# EAGLE board LEDDriver (EAGLE 7.4.0)
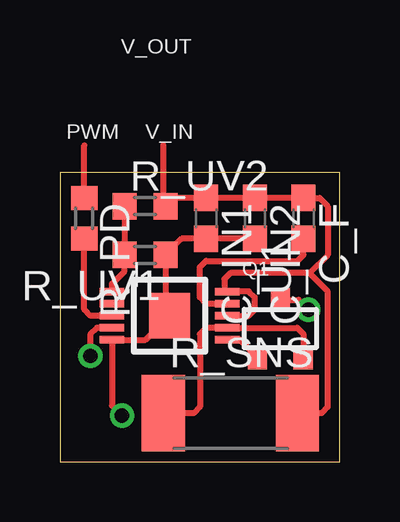
[diagram p0: board, top side]
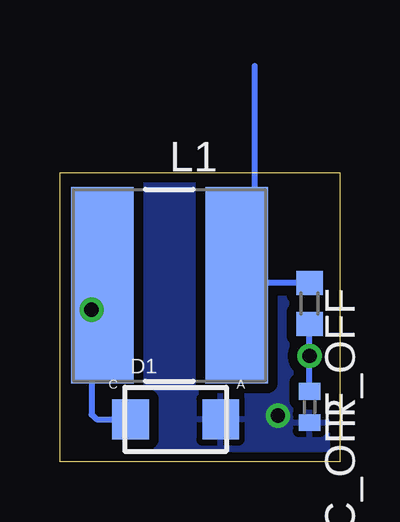
[diagram p1: board, bottom side, seen from below]

Size 11.68 x 12.06 mm. Coordinates in mm from the lower left corner, seen from the top.
Outline: 0,0 11.68,0 11.68,12.06 0,12.06 0,0
Copper layers (1*16): Top 0.035559375mm / dielectric 1.501140625mm / Bottom 0.035559375mm
Design rules "typical_4pcb": minimum track width 10mil, minimum drill 15mil, track to track 6mil, track to pad 6mil, pad to pad 6mil, via to via 6mil, smd to smd 6mil, copper to edge 15mil, drill to drill 8mil, minimum pad ring 10mil, minimum via ring 8mil, stop-mask expansion 4mil, vias tented up to drill 0mil, thermal gap 10mil

## Footprints (pad centres in the part's own frame; a part is rotated, then mirrored left to right if it is on the bottom)
C0603 = smd 1.1 x 1: 1 -0.85,0; 2 0.85,0
C0402 = smd 0.7 x 0.9: 1 -0.65,0; 2 0.65,0
SL12-E3/61T = smd 1.524 x 1.676: 1 -1.88,0; 2 1.88,0
SRN8040 = smd 2.6 x 8.2: 1 -2.8,0; 2 2.8,0
DMP2012SN-7 = smd 0.8 x 1: 1 0,1.2; 2 -0.95,-1.2; 3 0.95,-1.2
R0603 = smd 1 x 1.1: 1 -0.85,0; 2 0.85,0
R2512 = smd 1.8 x 3.2: 1 -2.8,0; 2 2.8,0
VSSOP-10 = smd 0.305 x 1.016: 1 -1.001,-2.4; 2 -0.5,-2.4; 3 0,-2.4; 4 0.5,-2.4; 5 1.001,-2.4; 6 1.001,2.4; 7 0.5,2.4; 8 0,2.4; 9 -0.5,2.4; 10 -1.001,2.4 | smd 1.905 x 1.727: DAP 0,0

## Placement (x,y rotation side)
C_F  1.0E-6  [C0603]  10.16,10.16 270 top
C_IN1  2.2E-6  [C0603]  6.1,10.16 270 top
C_IN2  2.2E-6  [C0603]  8.13,10.16 270 top
C_OFF  470E-12  [C0402]  1.27,2.29 270 bottom
D1  SL12-E3/61T  [SL12-E3/61T]  6.86,1.78 0 bottom
FRAME1  FRAME-LETTER  [CREATIVE_COMMONS]  -8.38,-12.95 0 top  (outside the outline)
L1  15E-6  [SRN8040]  7.11,7.37 0 bottom
Q1  DMP2012SN-7  [DMP2012SN-7]  9.19,5.56 0 top
R_OFF  7870  [R0603]  1.27,6.6 270 bottom
R_PD  10000  [R0603]  1.02,10.16 270 top
R_SNS  0.365  [R2512]  7.11,2.03 0 top
R_UV1  22600  [R0603]  3.56,8.64 180 top
R_UV2  13700  [R0603]  3.56,10.67 0 top
U1  LM3409HV'LM3409HV'  [VSSOP-10]  4.57,6.1 270 top

## Library data of the parts
C_F C_IN1 C_IN2 C_OFF = eagle-ltspice; SPICEMODEL: NONE; SPICEPREFIX: C
D1 L1 Q1 R_OFF R_PD R_SNS R_UV1 R_UV2 = DiscreteComponents
FRAME1 = SparkFun-Aesthetics
U1 = 2015_LED_Driver

## Nets
GND: C_IN1.2 C_IN2.2 C_OFF.2 D1.2 R_UV1.1 U1.5 U1.DAP
L1: D1.1 L1.1 Q1.1
N$1: C_F.2 U1.9
N$2: R_UV1.2 R_UV2.1 U1.1
N$3: Q1.2 U1.6
N$5: R_PD.2 U1.3
N$6: C_OFF.1 R_OFF.2 U1.4
N$8: Q1.3 R_SNS.1 U1.7
PWM: R_PD.1
V_IN: C_F.1 C_IN1.1 C_IN2.1 R_SNS.2 R_UV2.2 U1.8 U1.10
V_OUT: L1.2 R_OFF.1

## Tracks (layer width: path | path; a pad name or v marks a point on that pad's centre or on a via)
GND  (via drill 0.6)
  Top 0.254: C_IN2.2 C_IN1.2 5.08,9.31 R_UV1.1 4.41,6.26 U1.DAP 3.57,5.09 U1.5 2.17,2.35 v2.59,1.93
  pour Bottom (isolate 0.406): 0,12.06 11.68,12.06 11.68,0 0,0
L1  (via drill 0.6)
  Top 0.254: Q1.1 9.95,6.76 v10.36,6.35
  Bottom 0.254: D1.1 10.16,1.78 10.36,1.98 v10.36,6.35 9.91,6.8 L1.1
N$1
  Top 0.254: U1.9 6.1,6.6 5.84,6.86 5.84,8.13 6.1,8.38 9.91,8.38 10.16,8.64 C_F.2
N$2
  Top 0.254: R_UV2.1 R_UV1.2 2.69,8.62 2.69,7.95 2.17,7.43 U1.1
N$3
  Top 0.254: U1.6 7.51,5.09 Q1.2
N$4
  Top 0.254: 1.02,11.18 1.02,13.21
N$5
  Top 0.254: U1.3 1.27,6.1 1.02,6.35 R_PD.2
N$6  (via drill 0.6)
  Top 0.254: U1.4 1.53,5.6 1.27,5.33 v1.27,4.42
  Bottom 0.254: C_OFF.1 v1.27,4.42 R_OFF.2
N$7
  Top 0.254: 4.32,10.67 4.32,13.21
N$8
  Top 0.254: 6.98,5.59 U1.7 | 6.98,5.59 6.1,5.59 5.84,5.33 5.84,2.29 5.59,2.03 R_SNS.1 | 6.98,5.59 9.91,5.59 10.16,5.33 10.16,4.38 Q1.3
N$9
  Bottom 0.254: 3.56,8.89 3.56,16.51
V_IN
  Top 0.254: 6.99,7.12 U1.10 | U1.10 6.86,7.21 6.86,7.62 7.11,7.87 10.41,7.87 | 10.41,7.87 11.18,8.64 11.18,10.67 10.83,11.01 C_F.1 C_IN2.1 C_IN1.1 4.75,11.01 R_UV2.2 | 10.41,7.87 11.18,7.11 11.18,2.29 10.92,2.03 R_SNS.2 | U1.8 7.87,6.1 8.13,6.35 8.13,6.86 7.87,7.11 6.99,7.11 U1.10
V_OUT
  Bottom 0.254: R_OFF.1 4.22,7.45 L1.2

## Text on the board
tPlace: V_OUT | PWM | V_IN